# Altium PCB LPM_CLK.PcbDoc
Units mm, origin at the board's own origin, x right, y up, seen from the top; angles counter-clockwise.
Board outline 59.78 x 33.46 mm, 2 copper layers (Top Layer, Bottom Layer); 40 components, 22 nets, 152 pads, 109 vias.
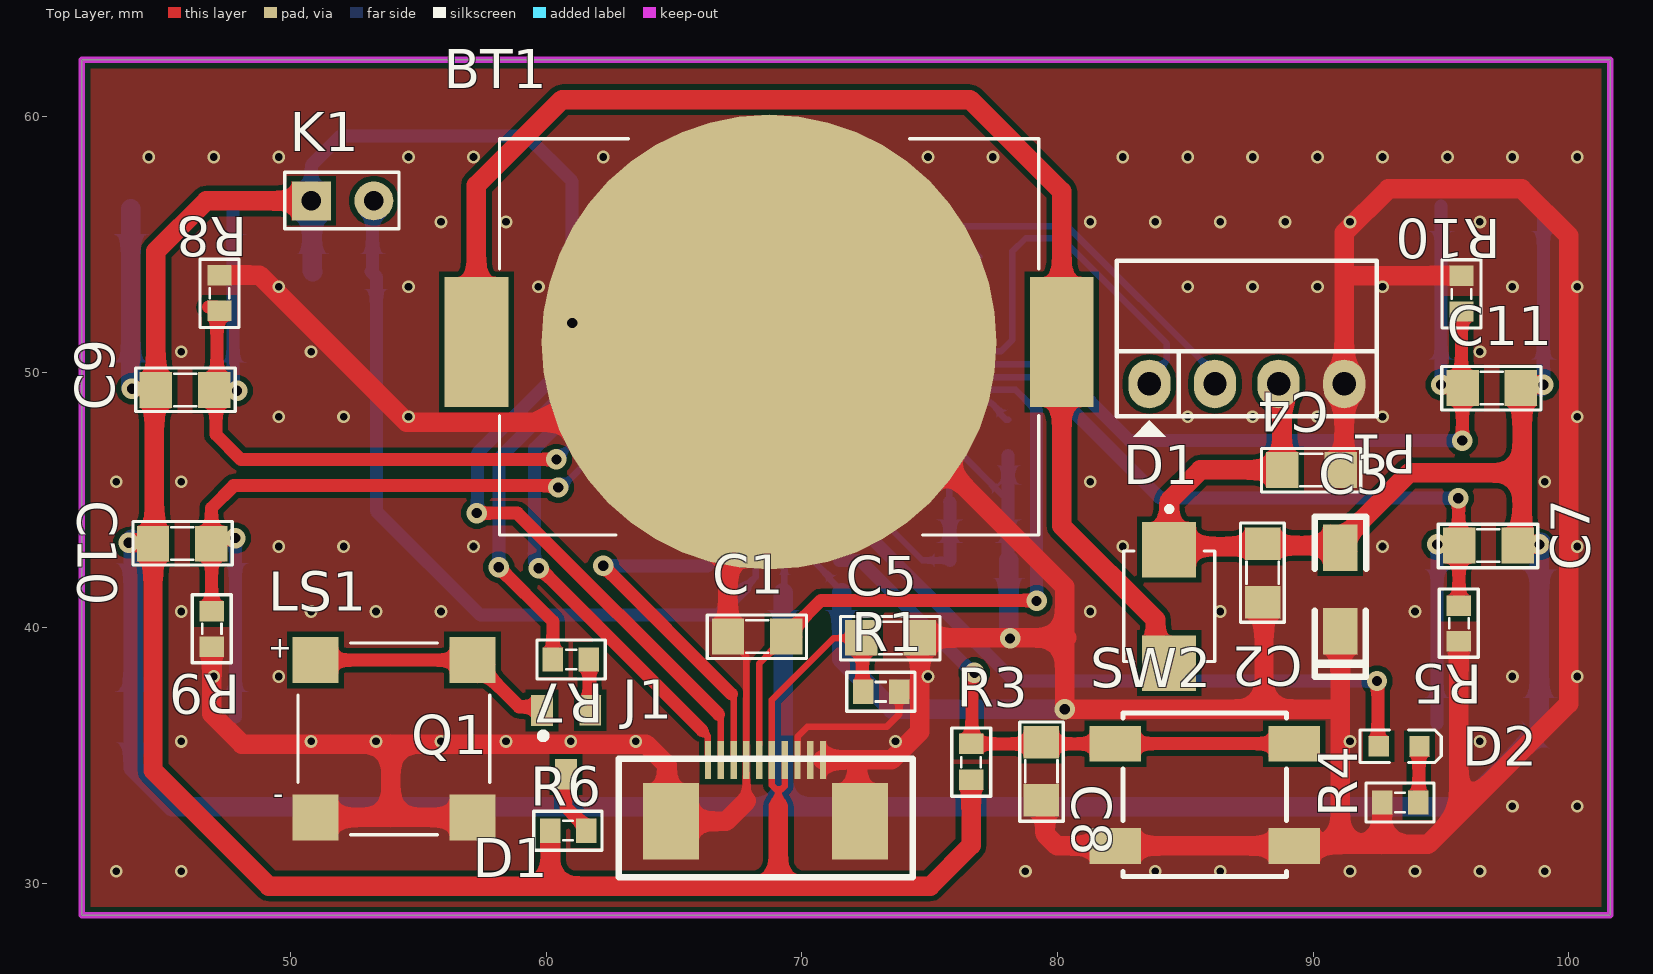
[diagram p0: Top Layer view]
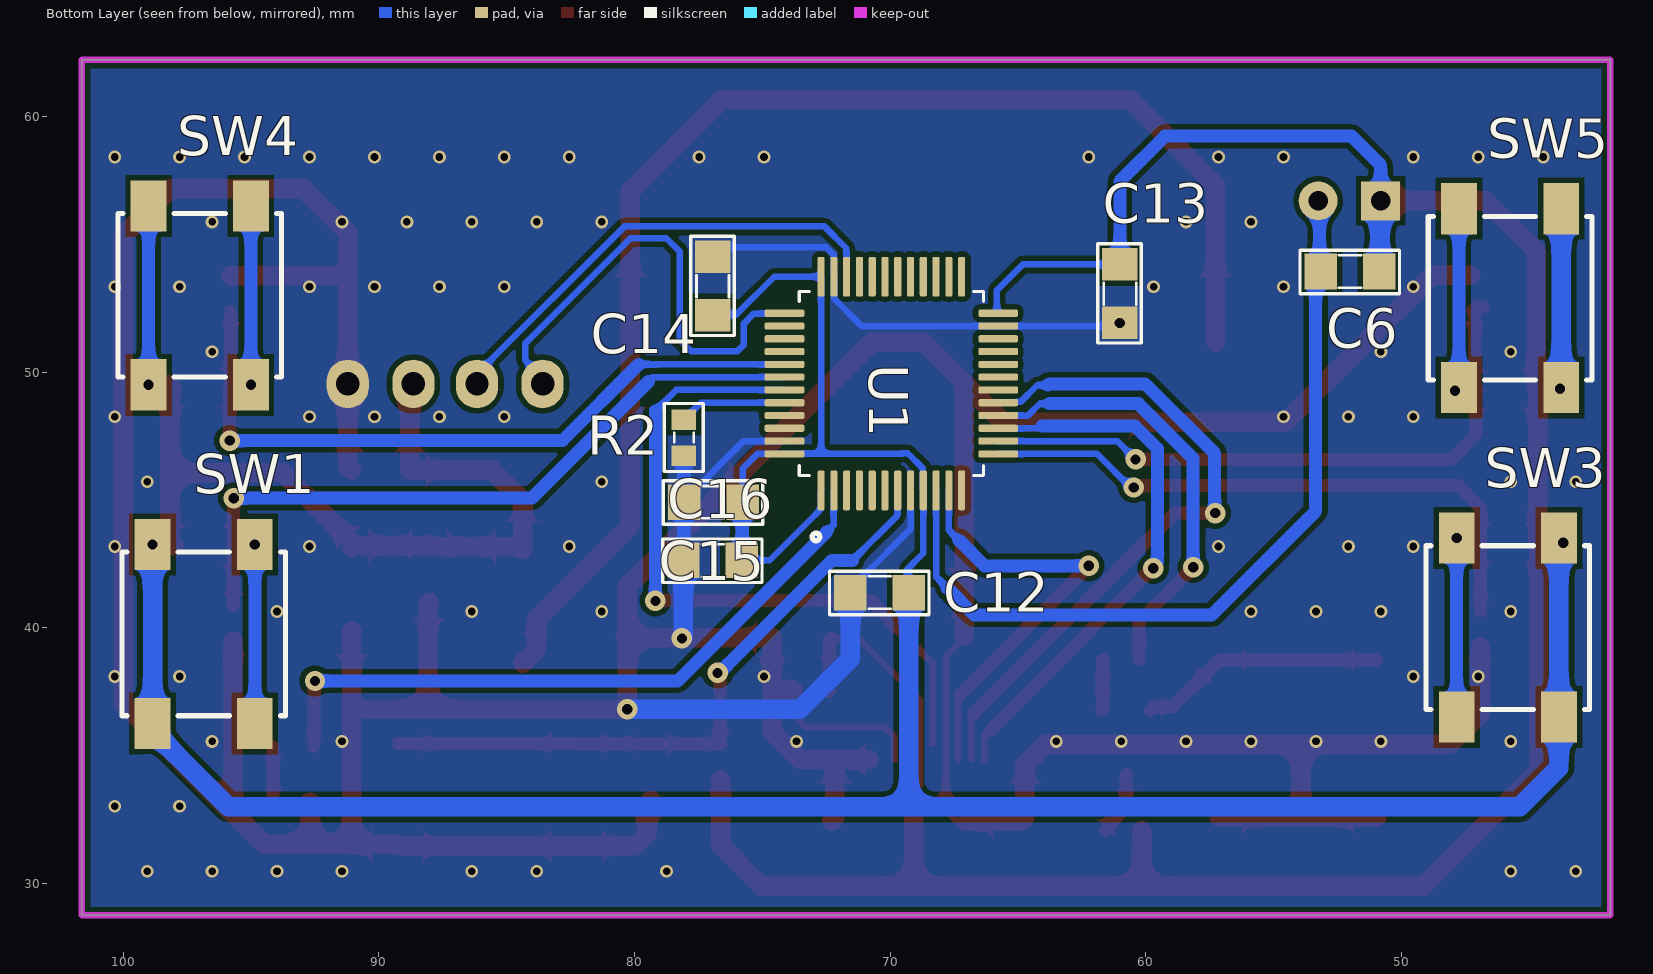
[diagram p1: Bottom Layer view, seen from below]
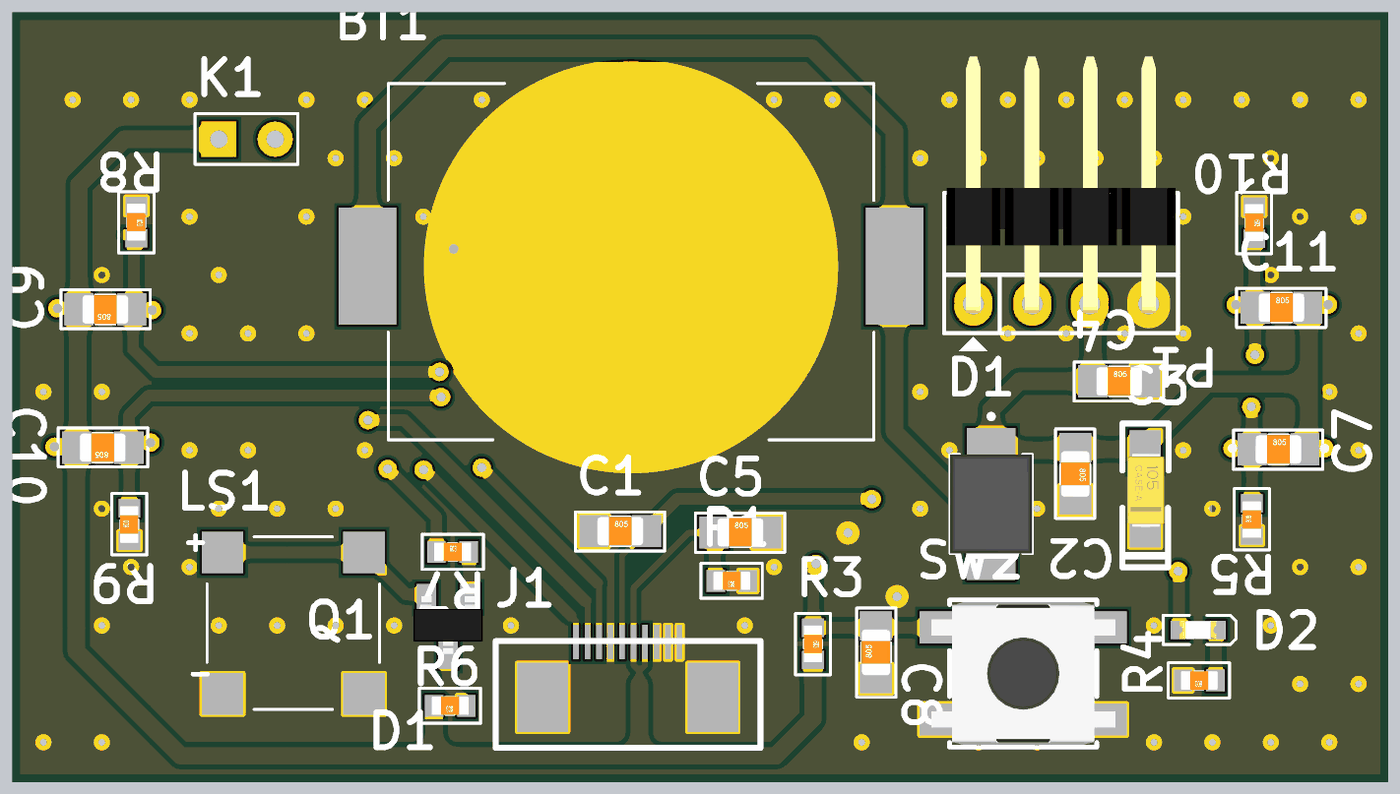
[diagram p2: 3D render of the assembled board from above, using the file's embedded part models]
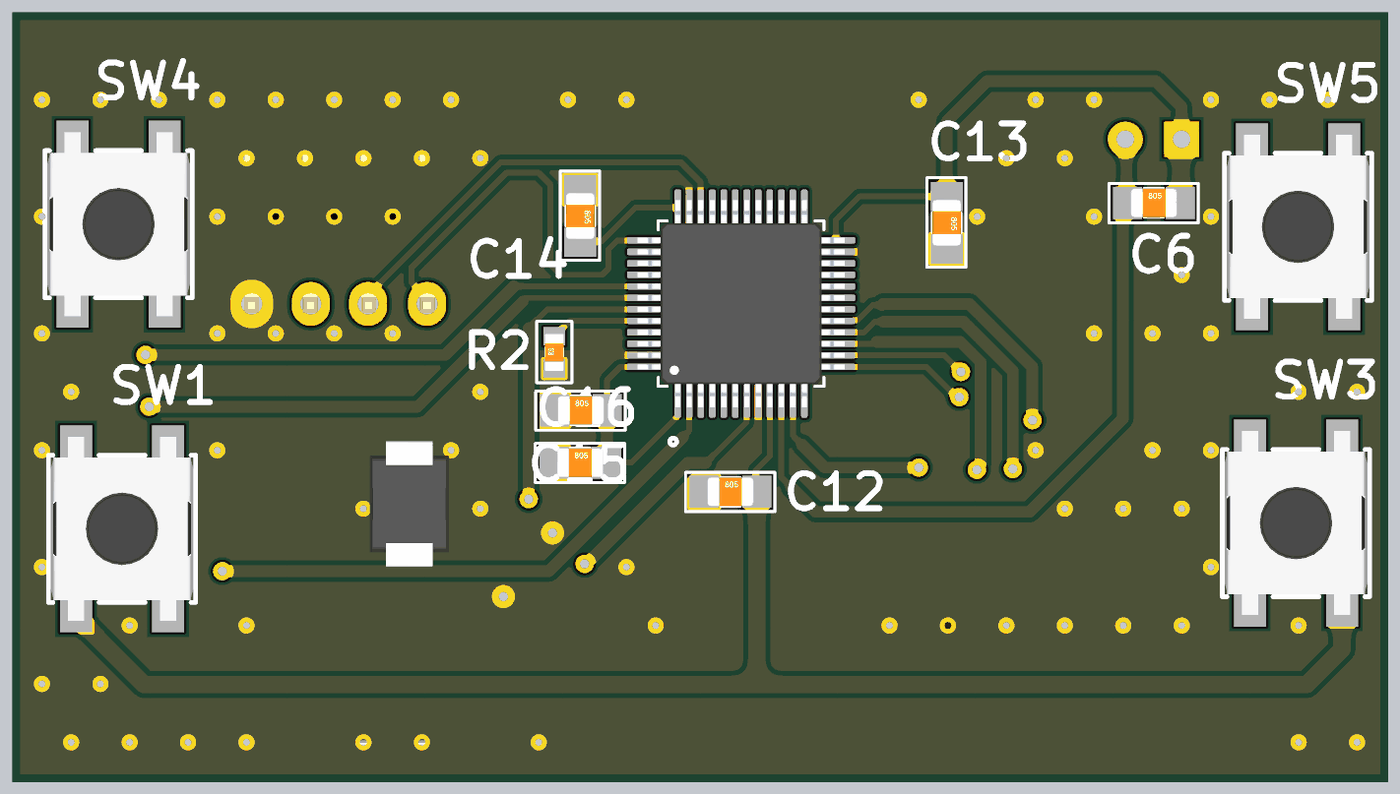
[diagram p3: 3D render of the assembled board from below, using the file's embedded part models]

## Layer stack, top to bottom
Top Solder: solder mask 0.0102, Solder Resist, Dk 3.5
Top Layer: signal copper 0.0356
Dielectric 1: dielectric 0.32, FR-4, Dk 4.8
Bottom Layer: signal copper 0.0356
Bottom Solder: solder mask 0.0102, Solder Resist, Dk 3.5

## Board outline
41.834,28.753 41.834,62.217 101.613,62.217 101.613,28.753

## Design rules (kind name [scope] priority, off if disabled: settings)
Clearance [All] p1: gap=0.203 ignorepadtopadclearanceinfootprint=TRUE
PlaneConnect [All] p1: planeconnectstyle=Direct reliefexpansion=0.508 reliefentries=4 reliefconductorwidth=0.254 reliefairgap=0.254
PolygonConnect [All] p1: connectstyle=Direct reliefconductorwidth=0.254 reliefentries=4 polygonreliefangle="90 Angle" airgapwidth=0.254
RoutingVias [All] p1: holewidth=0.4 width=0.8 viastyle="Through Hole" minholewidth=0.4 minwidth=0.8 maxholewidth=0.4 maxwidth=0.8
SolderMaskExpansion [All] p1: expansion=0.102 istentingtop=FALSE
Width [All] p1: maxlimit=0.762 minlimit=0.254 preferedwidth=0.508
29 further rules are at their usual default settings.

## Components (designator, comment, footprint, x,y, rotation, side; value= is the part's Value field where it differs from the comment)
BT1 "BAT-HLD-001" BAT_BAT-HLD-001 68.714,51.181 r180 top
C1 "Cap Non-Pol SMD" CAP-SM-0805 67.107,39.662 r0 top value=100pF
C2 "Cap Non-Pol SMD" CAP-SM-0805 88.024,43.294 r270 top value=104
C3 "1 µF, 16 V" "TANTALUM SMD A" 91.084,41.44 r270 top
C4 "Cap Non-Pol SMD" CAP-SM-0805 88.786,46.177 r0 top value=104
C5 "Cap Non-Pol SMD" CAP-SM-0805 72.322,39.609 r0 top value=100pF
C6 "Cap Non-Pol SMD" CAP-SM-0805 53.149,53.937 r180 bottom value=105
C7 "Cap Non-Pol SMD" CAP-SM-0805 95.707,43.218 r0 top value=105
C8 "Cap Non-Pol SMD" CAP-SM-0805 79.362,33.249 r90 top value=105
C9 "Cap Non-Pol SMD" CAP-SM-0805 47.015,49.301 r180 top value=105
C10 "Cap Non-Pol SMD" CAP-SM-0805 46.901,43.294 r180 top value=105
C11 "Cap Non-Pol SMD" CAP-SM-0805 95.841,49.384 r0 top value=105
C12 "Cap Non-Pol SMD" CAP-SM-0805 71.552,41.377 r180 bottom value=104
C13 "Cap Non-Pol SMD" CAP-SM-0805 61.011,54.216 r270 bottom value=104
C14 "Cap Non-Pol SMD" CAP-SM-0805 76.937,54.508 r270 bottom value=104
C15 "Cap Non-Pol SMD" CAP-SM-0805 78.057,44.916 r180 bottom value=104
C16 "Cap Non-Pol SMD" CAP-SM-0805 78.082,42.642 r180 bottom value=104
D1 "MBRS140T3G" DIOM5435X247N 84.366,40.843 r270 top
D2 "LED SMD" LED_0603_Blue 93.358,35.369 r0 top
J1 "FPC_connect" FPC_connect 68.575,34.834 r0 top
K1 "SW520" SW520D 52.006,56.706 r0 top
LS1 "CMT-7525-80-SMT-TR" XDCR_CMT-7525-80-SMT-TR 54.038,35.662 r0 top
P1 "Header 4H" JP4H 83.591,49.543 r0 top
Q1 "C1815" SOT23B 60.77,35.522 r180 top
R1 "RESISTOR SMD" RES-SM-0603 73.784,37.501 r180 top value=1K
R2 "RESISTOR SMD" RES-SM-0603 78.067,46.749 r90 bottom value=10K
R3 "RESISTOR SMD" RES-SM-0603 76.619,35.446 r270 top value=10K
R4 "RESISTOR SMD" RES-SM-0603 94.094,33.172 r180 top value=560
R5 "RESISTOR SMD" RES-SM-0603 95.694,39.484 r90 top value=10K
R6 "RESISTOR SMD" RES-SM-0603 61.544,32.067 r180 top value=100
R7 "RESISTOR SMD" RES-SM-0603 60.273,38.76 r0 top value=1K
R8 "RESISTOR SMD" RES-SM-0603 47.219,53.786 r270 top value=10K
R9 "RESISTOR SMD" RES-SM-0603 46.914,39.267 r90 top value=10K
R10 "RESISTOR SMD" RES-SM-0603 95.796,53.761 r270 top value=10K
SW1 "430451035836" WS-TASV_L6W6H3.5_4304x10358x6 96.85,39.764 r270 bottom
SW2 "430451035836" WS-TASV_L6W6H3.5_4304x10358x6 85.758,33.471 r180 top
SW3 "430451035836" WS-TASV_L6W6H3.5_4304x10358x6 45.834,40.013 r90 bottom
SW4 "430451035836" WS-TASV_L6W6H3.5_4304x10358x6 97.003,53.01 r270 bottom
SW5 "430451035836" WS-TASV_L6W6H3.5_4304x10358x6 45.745,52.895 r90 bottom
U1 "STM32F103C8T6" QFP50P900X900X160-48N 69.949,49.557 r90 bottom

## Footprints (in the part's own frame and the unit in brackets; to place one, negate y for a bottom-side part, rotate by r counter-clockwise, add the part's x,y. Pads: shape width x height; smd on the part's side, far side on the other; paste and mask are expansions set on the pad)
BAT_BAT-HLD-001 [mm]
  round 17.8 smd paste-10: N1(0,0)
  rect 2.5x5.1 smd: P1(-11.45,0) P2(11.45,0)
  silkscreen extent -10.55,-7.95 10.55,7.55
CAP-SM-0805 [mil]
  rect 50x55 smd: 1(0,0) 2(90,0)
  silkscreen extent -32,-34 121,33, body extent 6,-25 84,25, height 31
DIOM5435X247N [mm]
  rect 2.17x2.11 smd: 1(-2.22,0) 2(2.22,0)
  silkscreen extent -3.9,-1.78 2.16,1.78, body extent -2.72,-1.78 2.72,1.78, height 0.79
FPC_connect [mm]
  rect 0.25x1.5 smd: 1(-2.25,0) 2(-1.75,0) 3(-1.25,0) 4(-0.75,0) 5(-0.25,0) 6(0.25,0) 7(0.75,0) 8(1.25,0) 9(1.75,0) 10(2.25,0)
  rect 2.2x3 smd: ""(-3.7,-2.4) ""(3.7,-2.4)
  silkscreen extent -5.74,-4.6 5.77,0.05
JP4H [mil]
  oval 65x75 hole 36: 1(0,0) 2(101,0) 3(199,0) 4(300,0)
  silkscreen extent -50,-81 350,190, body extent -46,-15 346,424, height 99
LED_0603_Blue [mm] "Chip LED, 2-Leads, Body 1.6x0.8mm, IPC Medium Density"
  rect 0.8x0.8 smd: 1(-0.8,0) 2(0.8,0)
  silkscreen extent -1.52,-0.64 1.65,0.64, body extent -0.8,-0.4 0.8,0.4, height 0.7
QFP50P900X900X160-48N [mm]
  rrect50% 1.56x0.28 smd: 1(-4.18,2.75) 2(-4.18,2.25) 3(-4.18,1.75) 4(-4.18,1.25) 5(-4.18,0.75) 6(-4.18,0.25) 7(-4.18,-0.25) 8(-4.18,-0.75) 9(-4.18,-1.25) 10(-4.18,-1.75) 11(-4.18,-2.25) 12(-4.18,-2.75) 25(4.18,-2.75) 26(4.18,-2.25) 27(4.18,-1.75) 28(4.18,-1.25) 29(4.18,-0.75) 30(4.18,-0.25) 31(4.18,0.25) 32(4.18,0.75) 33(4.18,1.25) 34(4.18,1.75) 35(4.18,2.25) 36(4.18,2.75)
  rrect50% 0.28x1.56 smd: 13(-2.75,-4.18) 14(-2.25,-4.18) 15(-1.75,-4.18) 16(-1.25,-4.18) 17(-0.75,-4.18) 18(-0.25,-4.18) 19(0.25,-4.18) 20(0.75,-4.18) 21(1.25,-4.18) 22(1.75,-4.18) 23(2.25,-4.18) 24(2.75,-4.18) 37(2.75,4.18) 38(2.25,4.18) 39(1.75,4.18) 40(1.25,4.18) 41(0.75,4.18) 42(0.25,4.18) 43(-0.25,4.18) 44(-0.75,4.18) 45(-1.25,4.18) 46(-1.75,4.18) 47(-2.25,4.18) 48(-2.75,4.18)
  silkscreen extent -6.15,-3.6 3.6,3.6, body extent -4.5,-4.5 4.5,4.5, height 1.6
RES-SM-0603 [mm]
  rect 0.8x0.95 smd: 1(-0.014,0) 2(1.386,0)
  silkscreen extent -0.64,-0.76 2.03,0.76, body extent -0.11,-0.4 1.49,0.4, height 0.3
SOT23B [mm] "SOT 23B"
  rect 0.85x1.2 smd: 1(0.94,-1.245) 2(0,1.25) 3(-0.95,-1.25)
  silkscreen extent 0.77,-0.38 1.02,-0.13, body extent -1.5,-1.3 1.5,1.2, height 1.06
SW520D [mil]
  rect 60x60 hole 30: 0(-47.24,0)
  round 60 hole 30: 1(49,0)
  silkscreen extent -88,-43 88,44
"TANTALUM SMD A" [mil] "SMD TIPO A 3.2x1.6x1.6"
  rect 71.5x53.5 smd: 1(62,-1) 2(-67,-1)
  silkscreen extent -114,-40 132,39, body extent -63,-31 63,31, height 63
WS-TASV_L6W6H3.5_4304x10358x6 [mm] "SMD Tact Switch, body 6x6mm"
  rect 2x1.4 smd: A1(-3.5,2) A2(3.5,2) B1(-3.5,-2) B2(3.5,-2)
  silkscreen extent -3.2,-3.2 3.2,3.2, body extent -4,-3.1 4,3.1, height 3.5
XDCR_CMT-7525-80-SMT-TR [mm]
  rect 1.8x1.8 smd: 1(3.075,3.075) 2(3.075,-3.075) N(-3.075,-3.075) P(-3.075,3.075)
  silkscreen extent -3.75,-3.75 3.75,3.75

## Part data
BT1: "Battery Retainer Coin, 20.0mm 1 Cell SMD (SMT) Tab", Package=None, Availability=Unavailable, MP=BAT-HLD-001, Price=None
C1 C2 C4 C5 C6 C7 C8 C9 C10 C11 C12 C13 C14 C15 C16: "Capacitor"
C3: library part 01120610510, "CAP TANT 1uF 10% 16V 1206", Capacitance=1uF, Capacitance Tolerance=+/-10%, Manufacture  Name="KYOCERA AVX", Manufacture  SN=TAJA105K016RNJ, Rated Voltage="16 V", ComponentLink1Description="Datasheet link", ComponentLink1URL=https://datasheets.kyocera-avx.com/TAJ.pdf, ComponentLink2Description="Supplier 1 URL", ComponentLink2URL=https://www.mouser.vn/ProductDetail/KYOCERA-AVX/TAJA105K016RNJ?qs=OVpPYgiJXXWzOIbDvQCr4Q%3D%3D, ComponentLink3Description="Supplier 2 URL", ComponentLink3URL=https://www.digikey.com/en/products/detail/kyocera-avx/TAJA105K016RNJ/563757, ComponentLink4Description="Supplier 3 URL", ComponentLink4URL=https://www.thegioiic.com/tu-tantalum-1uf-16v-1206-taja105k016rnj, Mounting Technology=SMT, Size=1206, Supplier 1 Name=Mouser, Supplier 1 SN=581-TAJA105K016, Supplier 1 URL=https://www.mouser.vn/ProductDetail/KYOCERA-AVX/TAJA105K016RNJ?qs=OVpPYgiJXXWzOIbDvQCr4Q%3D%3D, Supplier 2 Name=Digi-Key, Supplier 2 SN=478-1649-1-ND, Supplier 2 URL=https://www.digikey.com/en/products/detail/kyocera-avx/TAJA105K016RNJ/563757, Supplier 3 Name=thegioiic, Supplier 3 SN=N/A, Supplier 3 URL=https://www.thegioiic.com/tu-tantalum-1uf-16v-1206-taja105k016rnj
D1: Package=None, Availability=Unavailable, MP=MBRS140T3G, Price=None
D2: "LED"
K1: library part SW520D
LS1: "7.5 mm, 3.6 Vo-p, 80 dB, Surface Mount (SMT), Magnetic Audio Transducer Buzzer", Package="CUI Devices", Check_prices=https://www.snapeda.com/parts/CMT-7525-80-SMT-TR/CUI+Devices/view-part/?ref=eda, CUI_purchase_URL=https://www.cuidevices.com/product/audio/buzzers/audio-transducers/cmt-7525-80-smt-tr?utm_source=snapeda.com&utm_medium=referral&utm_campaign=snapedaBOM, Digi-Key_Part_Number=102-CMT-7525-80-SMT-TR-ND, MF="CUI Devices", MP=CMT-7525-80-SMT-TR, Purchase-URL=https://pricing.snapeda.com/search/part/CMT-7525-80-SMT-TR/?ref=eda, SnapEDA_Link=https://www.snapeda.com/parts/CMT-7525-80-SMT-TR/CUI+Devices/view-part/?ref=snap
P1: "Header, 4-Pin, Right Angle", LatestRevisionDate=17-Jul-2002, LatestRevisionNote="Re-released for DXP Platform.", Publisher="Altium Limited"
Q1: "NPN Bipolar Transistor"
R1 R2 R3 R4 R5 R6 R7 R8 R9 R10: "Resistor"
SW1 SW2 SW3 SW4 SW5: "WS-TASV SMT Washable Tact Switch, L6 x W6 x H3.5mm, 360g, SPST-NO, 12V, 50mA", Manufacturer="Wurth Elektronik", Operating Temperature Max=85°C, Operating Temperature Min=-40°C, Rated Current=50mA, Rated Voltage=12VDC, Category="Tact Switches", Circuit=SPST-NO, ComponentLink2Description="Datasheet Link", ComponentLink2URL=https://www.we-online.com/redexpert/spec/430451035836?ad, Contact Material="Stainless Steel", Height=3.5mm, Length=6mm, Manufacturer Part Number=430451035836, Match Code=WS-TASV, Mount="Surface Mount", Operation Force=360g, Packaging="Tape and Reel", Supplier 1 Name=Mouser, Supplier 1 SN=710-430451035836, Supplier 1 URL=https://www.mouser.vn/ProductDetail/Wurth-Elektronik/430451035836?qs=wr8lucFkNMVsx4f3WHCAuQ%3D%3D, Supplier 2 Name=Digi-Key, Supplier 2 SN=732-7012-2-ND, Supplier 2 URL=https://www.digikey.com/en/products/detail/w%C3%BCrth-elektronik/430451035836/5209030, Supplier 3 Name=Thegioiic, Supplier 3 SN=N/A, Supplier 3 URL=https://www.thegioiic.com/nut-nhan-6x6mm-cao-3-4mm-4-chan-smd-dau-do, Terminal Material=Brass, Terminal Plating=Silver, Washable=Yes, Width=6mm
U1: "ARMÂ® CortexÂ®-M3 STM32F1 Microcontroller IC 32-Bit 72MHz 64KB (64K x 8) FLASH 48-LQFP (7x7)", Package="LQFP-48 STMicroelectronics", Availability="In Stock", Check_prices=https://www.snapeda.com/parts/STM32F103C8T6/STMicroelectronics/view-part/?ref=eda, MF=STMicroelectronics, MP=STM32F103C8T6, Price=None, Purchase-URL=https://pricing.snapeda.com/search/part/STM32F103C8T6/?ref=eda, SnapEDA_Link=https://www.snapeda.com/parts/STM32F103C8T6/STMicroelectronics/view-part/?ref=snap

## Via types
v1: diameter 0.5, hole 0.3, Top Layer to Bottom Layer, 87 vias
v2: diameter 0.8, hole 0.4, Top Layer to Bottom Layer, 22 vias

## Nets (pads, with @x,y where several pads share a name; then routed paths per layer and width w, separated by ;. In a path a pad name is that pad's centre, name@x,y a point inside that pad or via, vN(x,y) a via of type N, cw(c..) or ccw(c..) an arc to the next point about the centre after c; other vN are vias at no path point)
3V3: C2.1 C3.2 C4.1 C5.1 C6.2 C7.2 C9.2 C10.2 C11.2 C12.2 C13.1 C14.2 C15.2 C16.2 D1.1 J1.6 J1.7 K1.0 P1.3 R1.2 R3.2 R6.2 SW1.B1 SW1.B2 SW3.B1 SW3.B2 SW4.B1 SW4.B2 SW5.B1 SW5.B2 U1.1 U1.9 U1.24 U1.36 U1.48 | length 270.6
  Top Layer w0.254: 69.075,32.995 69.075,33.592 68.974,33.693 ; J1.7 69.325,33.812 69.206,33.693 68.974,33.693 ; C5.1 72.312,39.599 71.234,39.599 68.825,37.189 J1.6 68.825,33.842 68.974,33.693
  Top Layer w0.508: v2(43.79,49.351) C9.2@44.672,49.351 ; C5.1 72.36,39.571 72.36,37.539 R1.2
  Top Layer w0.762: v2(43.663,43.332) 43.67,43.325 44.584,43.325 C10.2 ; K1.0 46.698,56.706 44.729,54.737 44.729,49.408 44.672,49.351 44.672,43.351 C10.2 ; R6.2 60.158,29.894 ; 69.075,32.995 69.075,29.894 ; R3.2 76.619,31.496 75.017,29.894 69.075,29.894 ; P1.3 88.786,49.403 C4.1 85.585,46.177 84.366,44.958 D1.1 84.482,43.179 87.908,43.179 C2.1 88.1,43.218 C3.2@90.983,43.218 ; C3.2 91.059,43.37 93.751,46.063 98.171,46.063 ; C7.2 C7.2@98.039,43.264 ; v2(98.85,43.264) C7.2@98.039,43.264 ; v2(99.003,49.51) 98.995,49.503 98.245,49.503 C11.2 98.127,49.111 98.171,49.066 98.171,46.063 ; C10.2 44.615,34.43 49.15,29.894 60.158,29.894 ; 60.158,29.894 69.075,29.894 ; C7.2@98.039,43.264 98.171,43.396 98.171,46.063
  Bottom Layer w0.254: C13.1 64.808,54.216 65.824,53.2 65.824,52.32 65.811,52.307 U1.24 ; C12.2@69.313,41.634 69.313,42.307 68.699,42.921 U1.9 68.712,45.39 68.712,46.236 69.305,46.829 69.516,46.829 69.525,46.82 72.698,46.82 ; U1.1 72.712,45.364 72.712,44.636 74.706,42.642 C16.2 ; U1.36@72.698,53.737 72.698,46.82 ; U1.36 74.533,53.737 76.006,52.264 76.895,52.264 C14.2 ; C15.2 75.771,46.226 75.189,46.807 U1.48 74.116,46.82 72.698,46.82
  Bottom Layer w0.508: K1.0 50.806,58.096 51.943,59.233 59.245,59.233 61.011,57.468 C13.1 ; C15.2 75.783,44.903 75.783,42.655 C16.2 ; v2(99.003,49.51) SW4.B1
  Bottom Layer w0.762: SW5.B2 SW5.B1 v2(43.79,49.351) ; SW3.B2@43.79,43.46 v2(43.663,43.332) 43.834,43.161 43.834,34.537 45.377,32.995 69.266,32.995 ; K1.0 50.835,56.677 50.835,53.965 C6.2 ; C12.2 69.266,32.995 ; SW1.B1@98.926,43.34 v2(98.85,43.264) SW1.B2 98.85,35.964 95.881,32.995 69.266,32.995 ; SW4.B2@98.926,49.434 v2(99.003,49.51)
BUTTON1: C9.1 R8.2 SW5.A1 SW5.A2 U1.14 | length 32.7
  Top Layer w0.508: R8.2@46.78,52.546 47.073,52.546 R8.2 47.117,52.299 47.117,49.403 C9.1 C9.1@47.041,49.276 ; v2(47.904,49.276) C9.1@47.041,49.276 ; v2(60.395,46.588) 48.053,46.588 47.079,47.561 47.079,49.238 C9.1@47.041,49.276
  Bottom Layer w0.254: v2(60.395,46.588) 61.114,47.307 U1.14
  Bottom Layer w0.508: SW5.A1 SW5.A2
BUTTON2: C10.1 R9.2 SW3.A1 SW3.A2 U1.13 | length 31.9
  Top Layer w0.508: R9.2 46.907,40.659 46.907,43.288 C10.1 ; v2(47.834,43.513) 47.778,43.457 47.063,43.457 C10.1 ; v2(60.465,45.491) 60.386,45.491 60.316,45.561 47.771,45.561 46.901,44.691 C10.1
  Bottom Layer w0.254: v2(60.465,45.491) 60.592,45.491 61.907,46.807 U1.13
  Bottom Layer w0.508: SW3.A1 v2(47.834,43.513)
BUTTON3: C11.1 R10.2 SW4.A1 SW4.A2 U1.41 | length 35.9
  Top Layer w0.508: v2(95.003,49.51) 95.082,49.51 95.207,49.384 C11.1 ; R10.2 95.796,49.428 C11.1 ; v2(95.829,47.327) 95.835,47.332 95.835,49.378 C11.1
  Bottom Layer w0.254: U1.41 79.83,50.307
  Bottom Layer w0.508: 79.83,50.307 82.81,47.327 v2(95.829,47.327) ; v2(95.003,49.51) SW4.A1
BUTTON4: C7.1 R5.2 SW1.A1 SW1.A2 U1.42 | length 35.6
  Top Layer w0.508: v2(94.85,43.264) 94.873,43.241 95.684,43.241 C7.1 ; v2(95.669,45.072) 95.688,45.053 95.688,43.237 C7.1 ; R5.2 95.701,40.876 95.701,43.212 C7.1
  Bottom Layer w0.254: U1.42 79.293,49.807 79.442,49.658 79.442,49.641
  Bottom Layer w0.508: 79.442,49.641 84.01,45.072 v2(95.669,45.072) ; SW1.A2 v2(94.85,43.264)
BUZZER: R7.1 U1.16 | length 17.4
  Top Layer w0.508: v2(58.141,42.367) 60.259,40.249 R7.1
  Bottom Layer w0.254: 63.754,48.768 64.147,48.768 64.608,48.307 U1.16
  Bottom Layer w0.508: v2(58.141,42.367) 58.141,46.622 60.287,48.768 63.754,48.768
GND: BT1.N1 C1.1 C2.2 C3.1 C4.2 C5.2 C8.1 C12.1 C13.2 C14.1 C15.1 C16.1 J1. J1.4 J1.8 J1.9 J1.10 LS1.2 LS1.N P1.4 R1.1 R2.1 R4.2 R5.1 R8.1 R9.1 R10.1 SW2.A1 SW2.A2 U1.8 U1.23 U1.35 U1.47 | length 266.7
  Top Layer w0.254: C1.1 67.107,39.599 67.825,38.88 J1.4 67.825,33.23 ; J1.8 69.827,34.836 69.827,35.74 70.211,36.124 73.31,36.124 73.798,36.613 R1.1
  Top Layer w0.762: R9.1 46.914,36.636 48.094,35.456 53.924,35.456 ; R8.1@47.294,53.8 48.778,53.8 54.531,48.047 65.58,48.047 BT1.N1@67.107,49.574 ; LS1.N 53.924,32.587 ; LS1.2 53.924,32.587 ; C1.1 BT1.N1@67.107,49.574 ; 67.825,33.23 67.029,32.434 64.875,32.434 64.722,32.587 64.722,34.63 63.896,35.456 53.924,35.456 ; J1.10@70.823,34.832 73.503,34.832 74.617,35.945 74.617,37.679 ; 72.163,34.696 72.163,32.546 J1.@72.275,32.434 ; R1.1 73.798,37.576 73.817,37.595 74.533,37.595 74.617,37.679 ; C5.2 80.353,39.609 ; C5.2@74.617,39.6 74.617,37.679 ; C8.1 79.515,33.096 79.515,31.941 79.985,31.471 SW2.A2 SW2.A1 89.315,31.528 92.689,31.528 ; C2.2 88.075,40.957 88.075,36.817 ; 91.059,31.521 91.059,36.779 ; C3.1 91.059,36.779 ; C4.2 91.211,46.317 P1.4 91.211,55.448 92.939,57.175 98.158,57.175 99.987,55.347 99.987,37.033 95.694,32.741 ; 91.456,53.775 R10.1 ; R4.2 92.689,33.153 92.689,31.528 ; R5.1 95.694,32.741 ; 53.924,32.587 53.924,35.456 ; BT1.N1@67.107,49.574 BT1.N1 70.714,51.181 80.277,41.618 v2(80.277,36.817) 88.075,36.817 ; 88.075,36.817 91.021,36.817 91.059,36.779 ; 92.689,31.528 94.482,31.528 95.694,32.741
  Bottom Layer w0.254: v2(61.011,51.93) 61.134,51.807 U1.23 71.115,51.807 72.186,52.878 72.186,53.724 U1.35 72.212,53.75 72.212,54.596 72.505,54.889 76.556,54.889 C14.1 ; U1.8 69.199,43.869 71.044,42.024 71.044,41.948 C12.1@71.526,41.466 ; U1.47 75.729,47.307 C15.1@78.049,44.987
  Bottom Layer w0.508: C15.1@78.067,44.926 R2.1 ; C15.1@78.069,44.916 78.069,42.655 C16.1
  Bottom Layer w0.762: C12.1 71.552,38.798 73.533,36.817 v2(80.277,36.817) ; C16.1 78.082,39.657 78.143,39.596 v2(78.143,39.586)
  other v1: 43.18,30.48 45.72,30.48 78.74,30.48 83.82,30.48 86.36,30.48 91.44,30.48 93.98,30.48 96.52,30.48 99.06,30.48 97.79,33.02 100.33,33.02 45.72,35.56 50.8,35.56 53.34,35.56 55.88,35.56 58.42,35.56 60.96,35.56 63.5,35.56 73.66,35.56 91.44,35.56 96.52,35.56 46.99,38.1 49.53,38.1 74.93,38.1 97.79,38.1 100.33,38.1 45.72,40.64 50.8,40.64 53.34,40.64 55.88,40.64 81.28,40.64 86.36,40.64 93.98,40.64 49.53,43.18 52.07,43.18 57.15,43.18 82.55,43.18 92.71,43.18 100.33,43.18 43.18,45.72 45.72,45.72 81.28,45.72 99.06,45.72 49.53,48.26 52.07,48.26 54.61,48.26 85.09,48.26 87.63,48.26 90.17,48.26 92.71,48.26 100.33,48.26 45.72,50.8 50.8,50.8 96.52,50.8 49.53,53.34 54.61,53.34 59.69,53.34 85.09,53.34 87.63,53.34 90.17,53.34 92.71,53.34 97.79,53.34 100.33,53.34 55.88,55.88 58.42,55.88 81.28,55.88 83.82,55.88 86.36,55.88 88.9,55.88 91.44,55.88 96.52,55.88 44.45,58.42 46.99,58.42 49.53,58.42 54.61,58.42 57.15,58.42 62.23,58.42 74.93,58.42 77.47,58.42 82.55,58.42 85.09,58.42 87.63,58.42 90.17,58.42 92.71,58.42 95.25,58.42 97.79,58.42 100.33,58.42
LCD_EN: C1.2 J1.5 U1.43 | length 27.9
  Top Layer w0.254: J1.5@68.322,35.535 68.322,38.592 68.821,39.091 68.885,39.091 69.393,39.599 C1.2 ; J1.5@68.323,35.457 J1.5@68.323,35.534
  Top Layer w0.508: C1.2 69.393,39.726 70.739,41.072 79.164,41.072 v2(79.18,41.056)
  Bottom Layer w0.254: U1.43 78.366,49.307 79.18,48.493
  Bottom Layer w0.508: v2(79.18,41.056) 79.18,48.493
LED: D2.1 U1.2 | length 26.8
  Top Layer w0.508: v2(92.494,37.922) 92.526,37.89 92.526,35.401 D2.1
  Bottom Layer w0.254: U1.2 72.212,45.364 72.212,44.018 72.479,43.752
  Bottom Layer w0.508: 72.479,43.752 78.308,37.922 v2(92.494,37.922)
NetBT1_P1: BT1.P1 BT1.P2 D1.2 | length 52.1
  Top Layer w0.762: BT1.P2 57.264,57.315 60.614,60.665 76.571,60.665 80.164,57.072 BT1.P1 80.164,43.991 83.833,40.322 83.833,39.156 D1.2
NetD2_2: D2.2 R4.1 | length 2.2
  Top Layer w0.508: R4.1 94.133,33.197 94.133,35.344 D2.2
NetLS1_P: LS1.1 LS1.P Q1.1 | length 9.7
  Top Layer w0.508: LS1.P LS1.1 58.94,36.91 59.686,36.91 Q1.1
NetQ1_2: Q1.2 R6.1 | length 2.5
  Top Layer w0.508: Q1.2 60.77,32.978 61.412,32.335 61.412,32.214 R6.1
NetQ1_3: Q1.3 R7.2 | length 2
  Top Layer w0.508: R7.2 61.689,38.73 61.689,36.802 Q1.3
NetR2_2: R2.2 U1.44 | length 4.3
  Bottom Layer w0.254: U1.44 77.394,48.807 77.719,48.482 77.719,48.408 77.992,48.134 R2.2
RESET: C8.2 R3.1 SW2.B1 SW2.B2 U1.7 | length 26
  Top Layer w0.508: v2(76.746,38.24) 76.746,38.161 76.644,38.059 76.644,35.606 76.619,35.581 R3.1 76.624,35.465 79.362,35.465 82.253,35.465 SW2.B2 SW2.B1
  Bottom Layer w0.254: U1.7 69.712,45.364 69.712,44.398 71.476,42.634
  Bottom Layer w0.508: 71.476,42.634 72.275,42.634 76.669,38.24 v2(76.746,38.24)
SPI_CLK: J1.1 U1.15 | length 21.6
  Top Layer w0.254: 66.091,35.99 66.323,35.758 66.323,34.836 J1.1
  Top Layer w0.508: v2(59.703,42.329) 59.751,42.329 66.091,35.99
  Bottom Layer w0.254: 64.054,47.891 64.139,47.807 U1.15
  Bottom Layer w0.508: v2(59.703,42.329) 59.703,42.408 59.538,42.573 59.538,47.013 60.416,47.891 64.054,47.891
SPI_CS: J1.3 U1.11 | length 17.2
  Top Layer w0.254: 67.241,37.329 67.325,37.245 J1.3
  Top Layer w0.508: v2(62.227,42.427) 67.241,37.413
  Bottom Layer w0.254: 67.297,43.421 67.699,43.823 U1.11
  Bottom Layer w0.508: v2(62.227,42.427) 66.303,42.427 67.297,43.421
SPI_MOSI: J1.2 U1.17 | length 26.8
  Top Layer w0.254: 66.741,36.617 66.827,36.53 66.827,34.836 J1.2
  Top Layer w0.508: v2(57.283,44.488) 58.869,44.488 66.741,36.617
  Bottom Layer w0.254: 63.83,49.492 64.238,49.492 64.893,48.837 65.04,48.837 65.057,48.82 65.756,48.82 U1.17
  Bottom Layer w0.508: v2(57.283,44.488) 57.302,44.507 57.302,46.825 60.02,49.543 63.779,49.543 63.83,49.492
SWDCLK: P1.1 U1.37 | length 18.7
  Bottom Layer w0.254: U1.37 74.142,52.294 75.329,52.294 75.717,51.906 75.717,51.079 75.984,50.813 77.778,50.813 78.236,51.27 78.236,54.728 78.753,55.245 80.15,55.245 84.277,51.117 84.277,50.48 83.591,49.794 P1.1
SWDIO: P1.2 U1.34 | length 18.7
  Bottom Layer w0.254: U1.34 71.712,53.75 71.712,54.846 72.568,55.702 80.391,55.702 86.157,49.936 P1.2
WKUP: C6.1 K1.1 U1.10 | length 32.8
  Bottom Layer w0.254: 67.767,41.567 68.199,41.999 U1.10
  Bottom Layer w0.508: K1.1 53.2,56.655 53.2,53.988 C6.1 53.353,53.734 53.353,44.564 57.417,40.5 66.7,40.5 67.767,41.567
pads on no net: U1.3 U1.4 U1.5 U1.6 U1.12 U1.18 U1.19 U1.20 U1.21 U1.22 U1.25 U1.26 U1.27 U1.28 U1.29 U1.30 U1.31 U1.32 U1.33 U1.38 U1.39 U1.40 U1.45 U1.46

## Polygon pours and split planes (outlines as drawn)
GND on Top Layer "GND_L01_P000" (solid, remove dead copper, pour order 0): 41.834,28.753 41.834,62.217 101.613,62.217 101.613,28.753
GND on Bottom Layer "GND_L02_P001" (solid, remove dead copper, pour order 1): 41.834,28.753 41.834,62.217 101.613,62.217 101.613,28.753

## Keep-outs
Keep-Out Layer:
  the board outline again, w0.254

## Silkscreen, mask and mechanical layers (free items; w line width, h text height)
Top Overlay:
  text "D1" at 57.125,30.251 h1.52

## Text inside footprints (layer, text, board x,y; h text height)
LS1: Top Overlay "-" at 49.324,33.122 h0.81; Top Overlay "+" at 49.124,38.837 h0.81; Mechanical 13 "+" at 49.124,38.837 h0.81; Mechanical 13 "-" at 49.324,33.122 h0.81